# Altium PCB PCB2.PcbDoc
Units mil, origin at the board's own origin, x right, y up, seen from the top; angles counter-clockwise.
Board outline 1574.8 x 1183.58 mil, 2 copper layers (Top Layer, Bottom Layer); 3 components, 3 nets, 20 pads, 51 vias.
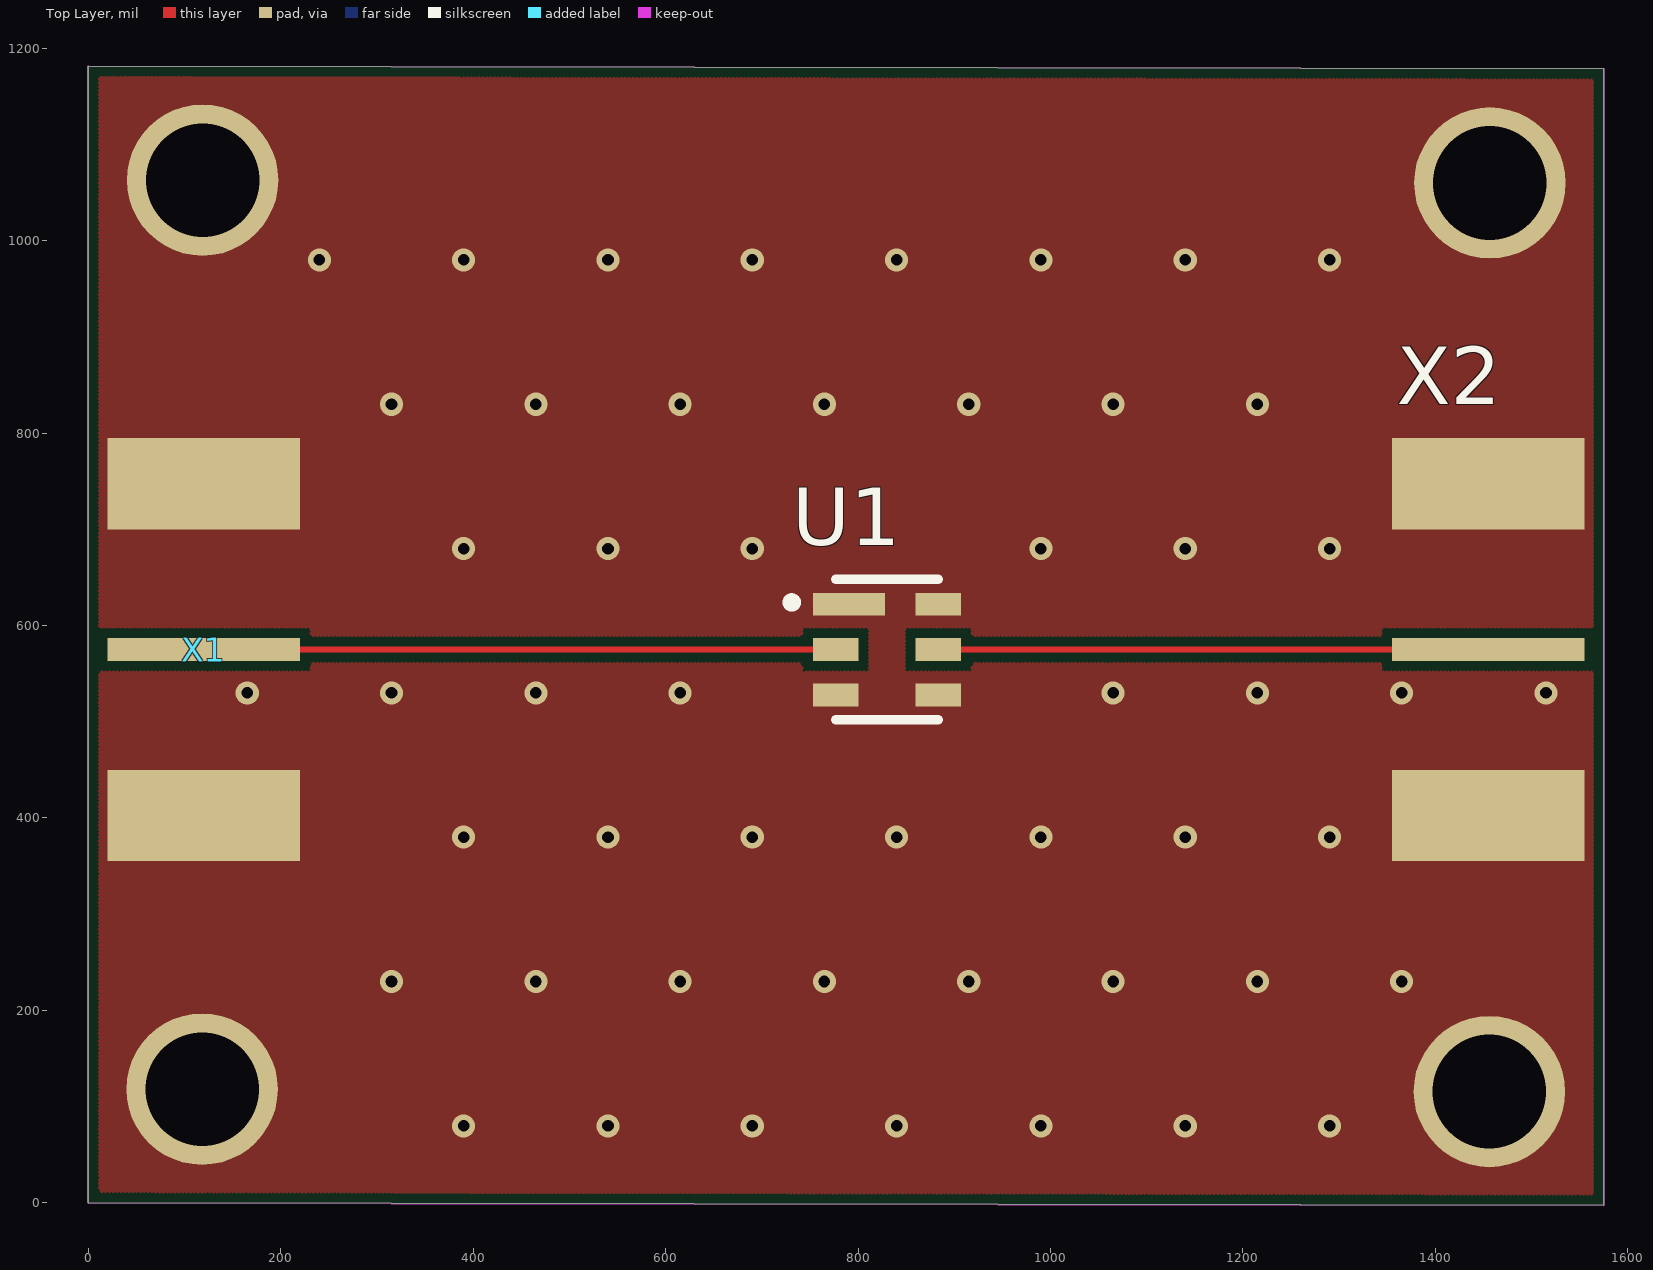
[diagram p0: Top Layer view]
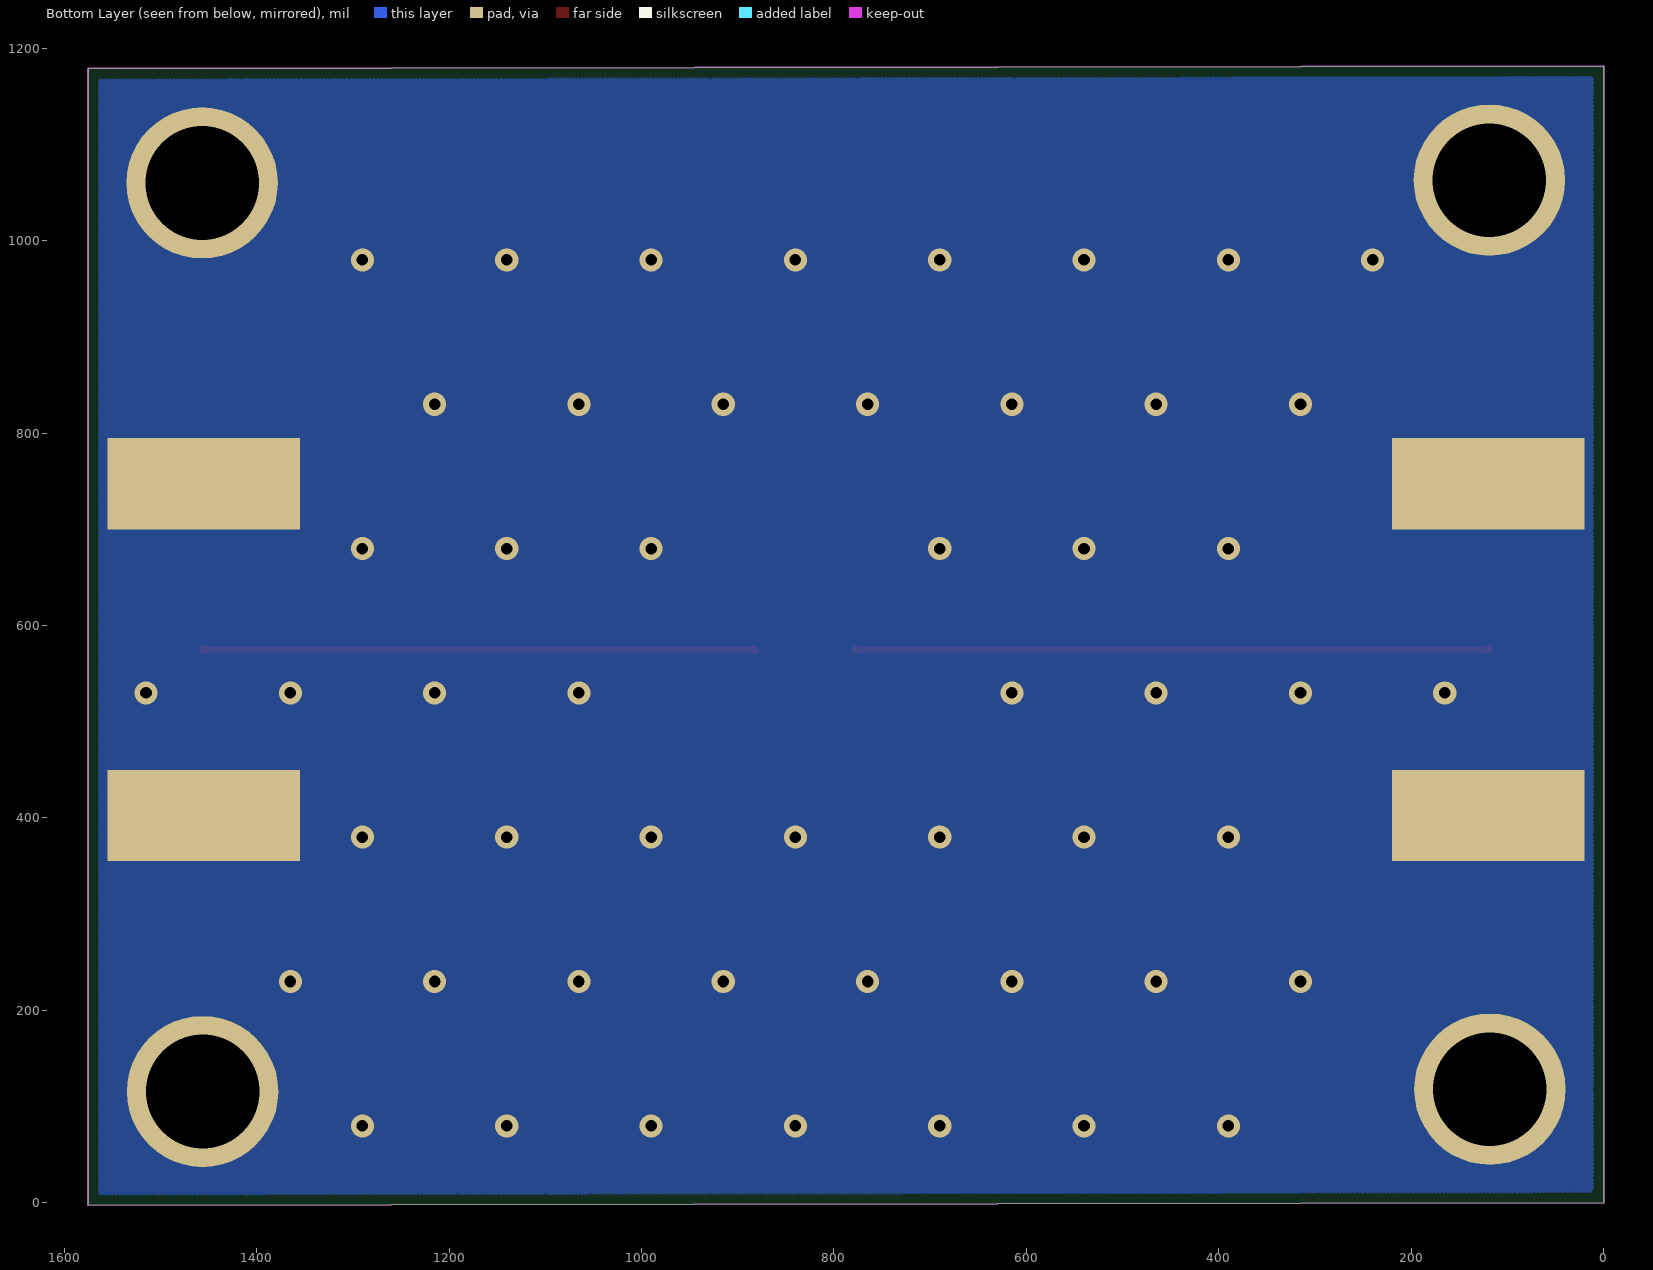
[diagram p1: Bottom Layer view, seen from below]

## Layer stack, top to bottom
Top Solder: solder mask 0.4, Solder Resist, Dk 3.5
Top Layer: signal copper 1.4
Dielectric 1: dielectric 12.6, FR-4, Dk 4.8
Bottom Layer: signal copper 1.4
Bottom Solder: solder mask 0.4, Solder Resist, Dk 3.5

## Board outline
0,0 1574.8,-2.48 1574.8,1178.63 0,1181.1

## Design rules (kind name [scope] priority, off if disabled: settings)
Clearance [All] p1: gap=10 ignorepadtopadclearanceinfootprint=FALSE except(0: Arc-Hole Track-Hole SMDPad-Hole THPad-Hole Via-Hole Fill-Hole Poly-Hole Region-Hole Text-Hole)
PlaneConnect [All] p1: planeconnectstyle=Direct reliefexpansion=20 reliefentries=4 reliefconductorwidth=10 reliefairgap=10
PolygonConnect [All] p1: connectstyle=Direct reliefconductorwidth=10 reliefentries=4 polygonreliefangle="90 Angle" airgapwidth=10
RoutingVias [All] p1: holewidth=28 width=50 viastyle="Through Hole" minholewidth=28 minwidth=50 maxholewidth=28 maxwidth=50
SolderMaskExpansion [All] p1: expansion=4
Width [All] p1: maxlimit=10 minlimit=10 preferedwidth=10
29 further rules are at their usual default settings.

## Components (designator, comment, footprint, x,y, rotation, side; value= is the part's Value field where it differs from the comment)
U1 "SAW_FILTER" SAW_3.0 830,575 r0 top
X1 "SMA" SMA1 120,575 r0 top
X2 "SMA" SMA1 1455,575.01 r180 top

## Footprints (in the part's own frame and the unit in brackets; to place one, negate y for a bottom-side part, rotate by r counter-clockwise, add the part's x,y. Pads: shape width x height; smd on the part's side, far side on the other; paste and mask are expansions set on the pad)
SAW_3.0 [mm]
  rect 1.9x0.6 smd: 1(-1,1.2)
  rect 1.2x0.6 smd: 2(-1.35,0) 3(-1.35,-1.2) 4(1.35,-1.2) 5(1.35,0) 6(1.35,1.2)
  silkscreen extent -2.63,-1.85 1.35,1.85, body extent -1.55,-1.5 1.55,1.5, height 1.1
SMA1 [mil]
  rect 200x24 smd: 1(0,0)
  rect 200x95 smd: 2(0,-172.5) 2(0,172.5)
  rect 200x95 smd far side: 2(0,-172.5) 2(0,172.5)
  body extent -475,-187 87,187, height 171

## Free pads (board coordinates)
  round 157.48 hole 118.11: 16(118.11,118.11) 16(118.61,1062.99) 16(1456.19,115.63) 16(1456.69,1060.02)

## Via types
v1: diameter 24, hole 12, Top Layer to Bottom Layer, tented both sides, 51 vias

## Nets (pads, with @x,y where several pads share a name; then routed paths per layer and width w, separated by ;. In a path a pad name is that pad's centre, name@x,y a point inside that pad or via, vN(x,y) a via of type N, cw(c..) or ccw(c..) an arc to the next point about the centre after c; other vN are vias at no path point)
GND: pad.16 U1.1 U1.3 U1.4 U1.6 X1.2 X2.2
  other v1: 390,80 540,80 690,80 840,80 990,80 1140,80 1290,80 315,230 465,230 615,230 765,230 915,230 1065,230 1215,230 1365,230 390,380 540,380 690,380 840,380 990,380 1140,380 1290,380 165,530 315,530 465,530 615,530 1065,530 1215,530 1365,530 1515,530 390,680 540,680 690,680 990,680 1140,680 1290,680 315,830 465,830 615,830 765,830 915,830 1065,830 1215,830 240,980 390,980 540,980 690,980 840,980 990,980 1140,980 1290,980
NetU1_2: U1.2 X1.1 | length 656.9
  Top Layer w6: X1.1 U1.2
NetU1_5: U1.5 X2.1 | length 571.9
  Top Layer w6: U1.5 X2.1

## Polygon pours and split planes (outlines as drawn)
GND on Top Layer (hatched 90Degree grid 4 track 5, remove dead copper, pour order 2): -0.5,1181.1 1.98,1178.63 1575.3,1178.63 1575.3,-2.48 1574.8,-2.98 1572.32,-0.5 0,-0.5
GND on Bottom Layer (hatched 90Degree grid 4 track 5, remove dead copper, pour order 0): -0.5,1181.1 1.98,1178.63 1575.3,1178.63 1575.3,-2.48 1574.8,-2.98 1572.32,-0.5 0,-0.5

## Keep-outs
Keep-Out Layer:
  lines w1: -0.5,0 ccw(c0,0) 0,-0.5 ; -0.5,0 ccw(c0,0) 0,-0.5 ; -0.5,0 -0.5,1181.1 ; -0.5,1181.1 cw(c0,1181.1) 0,1181.6 ; -0.5,1181.1 cw(c0,1181.1) 0,1181.6 ; 0,-0.5 1574.8,-2.98 ; 0,1181.6 1574.8,1179.13 ; 1574.8,-2.98 ccw(c1574.8,-2.48) 1575.3,-2.48 ; 1574.8,-2.98 ccw(c1574.8,-2.48) 1575.3,-2.48 ; 1574.8,1179.13 cw(c1574.8,1178.63) 1575.3,1178.63 ; 1574.8,1179.13 cw(c1574.8,1178.63) 1575.3,1178.63 ; 1575.3,-2.48 1575.3,1178.63